# Altium PCB PCB1.PcbDoc
Units mil, origin at the board's own origin, x right, y up, seen from the top; angles counter-clockwise.
Board outline 3000 x 2500 mil, 2 copper layers (Top Layer, Bottom Layer); 72 components, 43 nets, 247 pads, 80 vias.
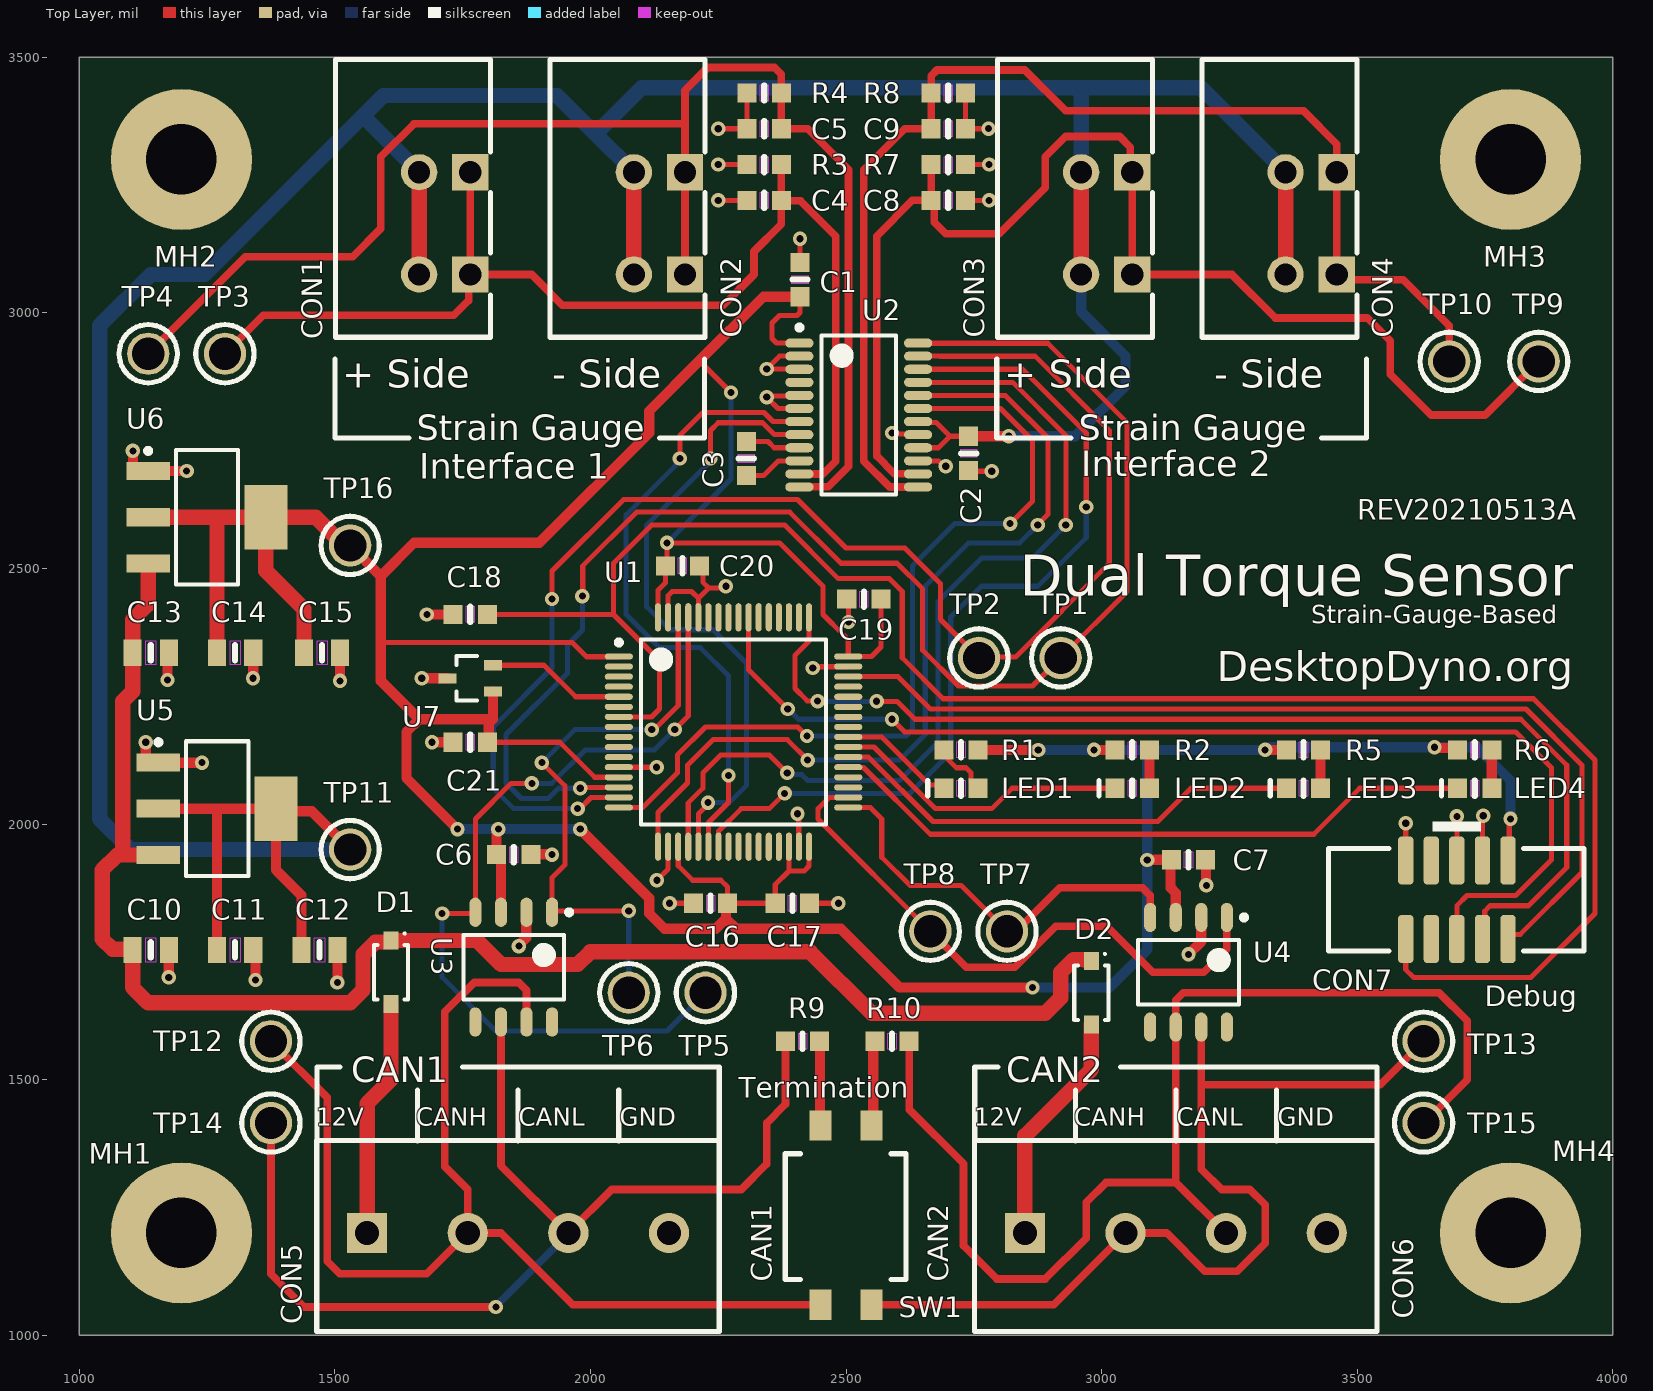
[diagram p0: Top Layer view]
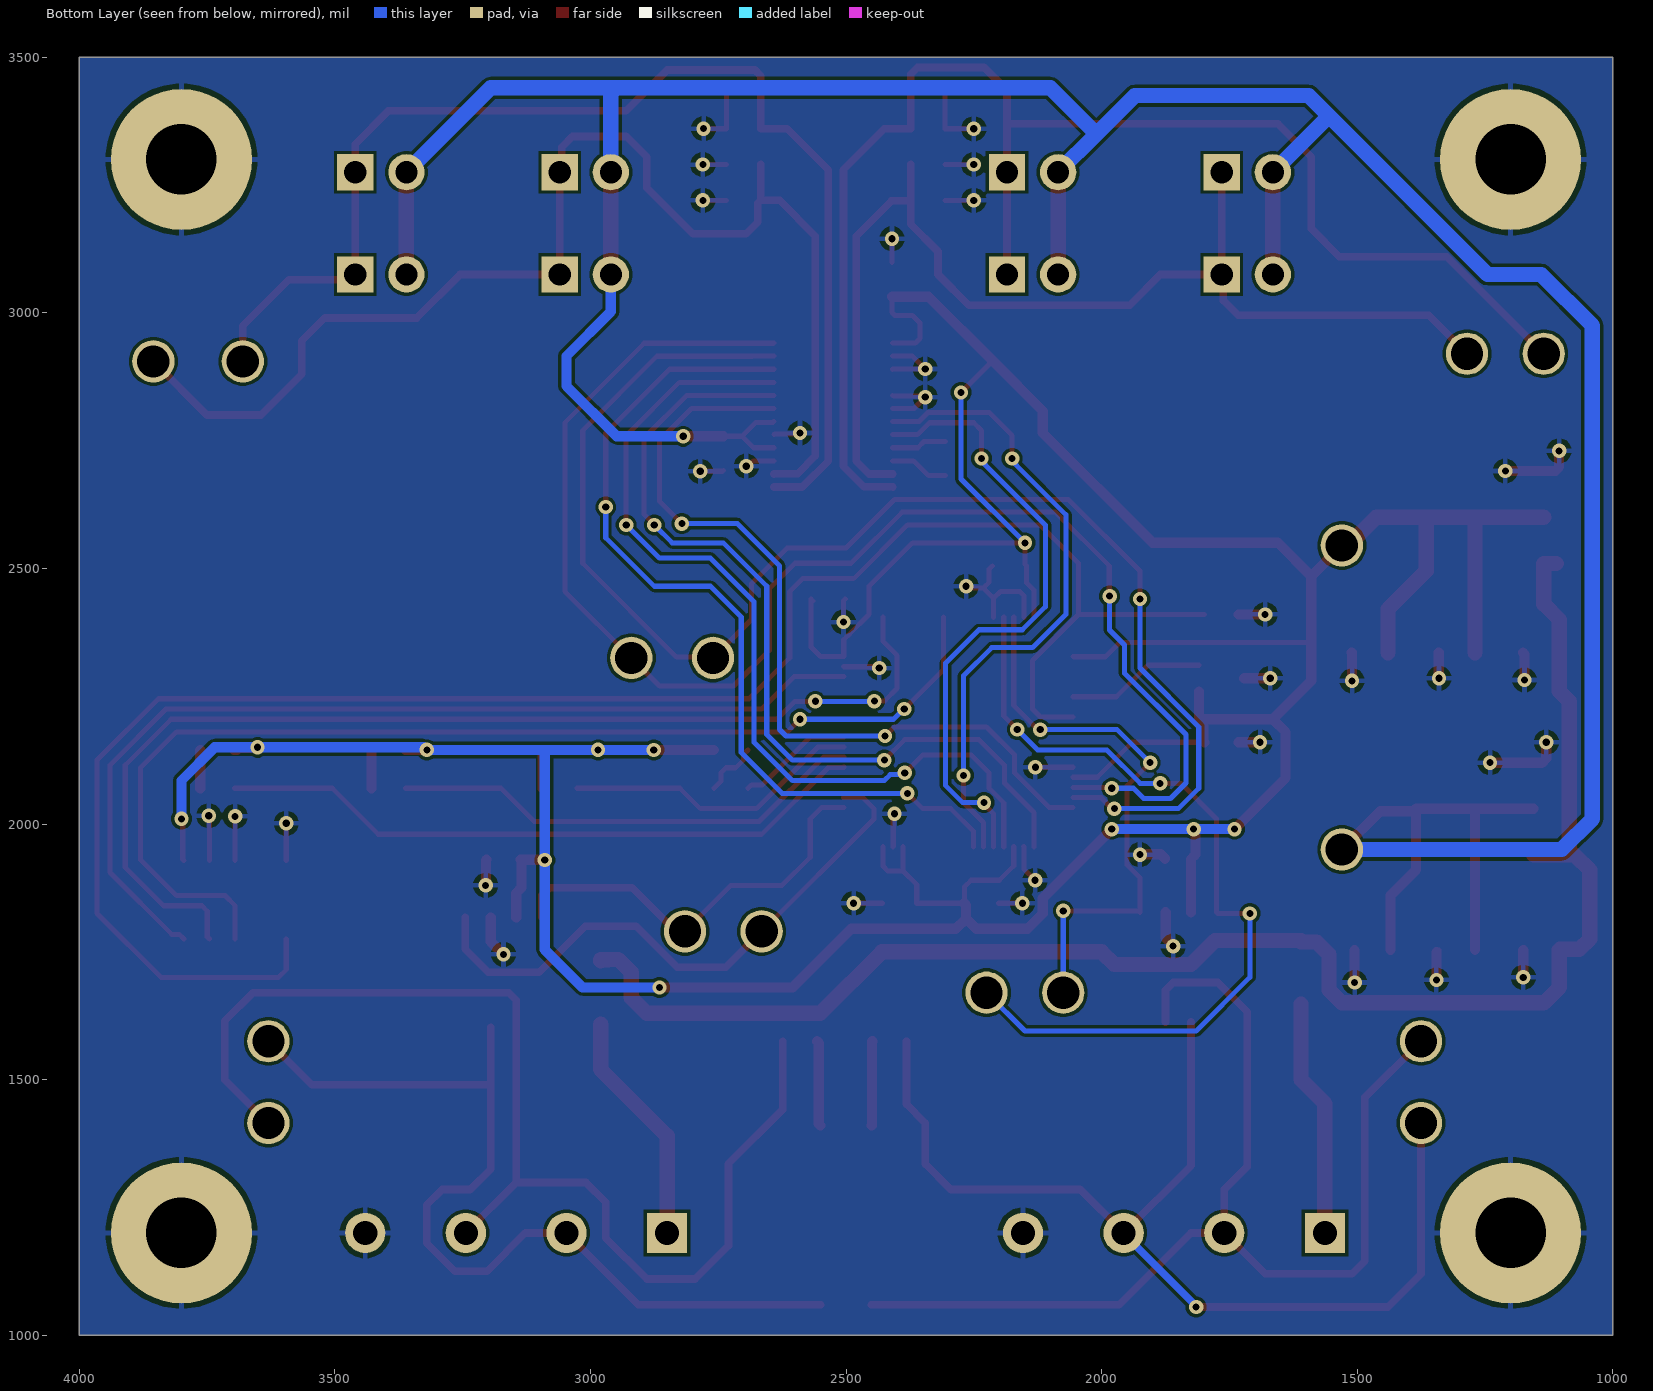
[diagram p1: Bottom Layer view, seen from below]
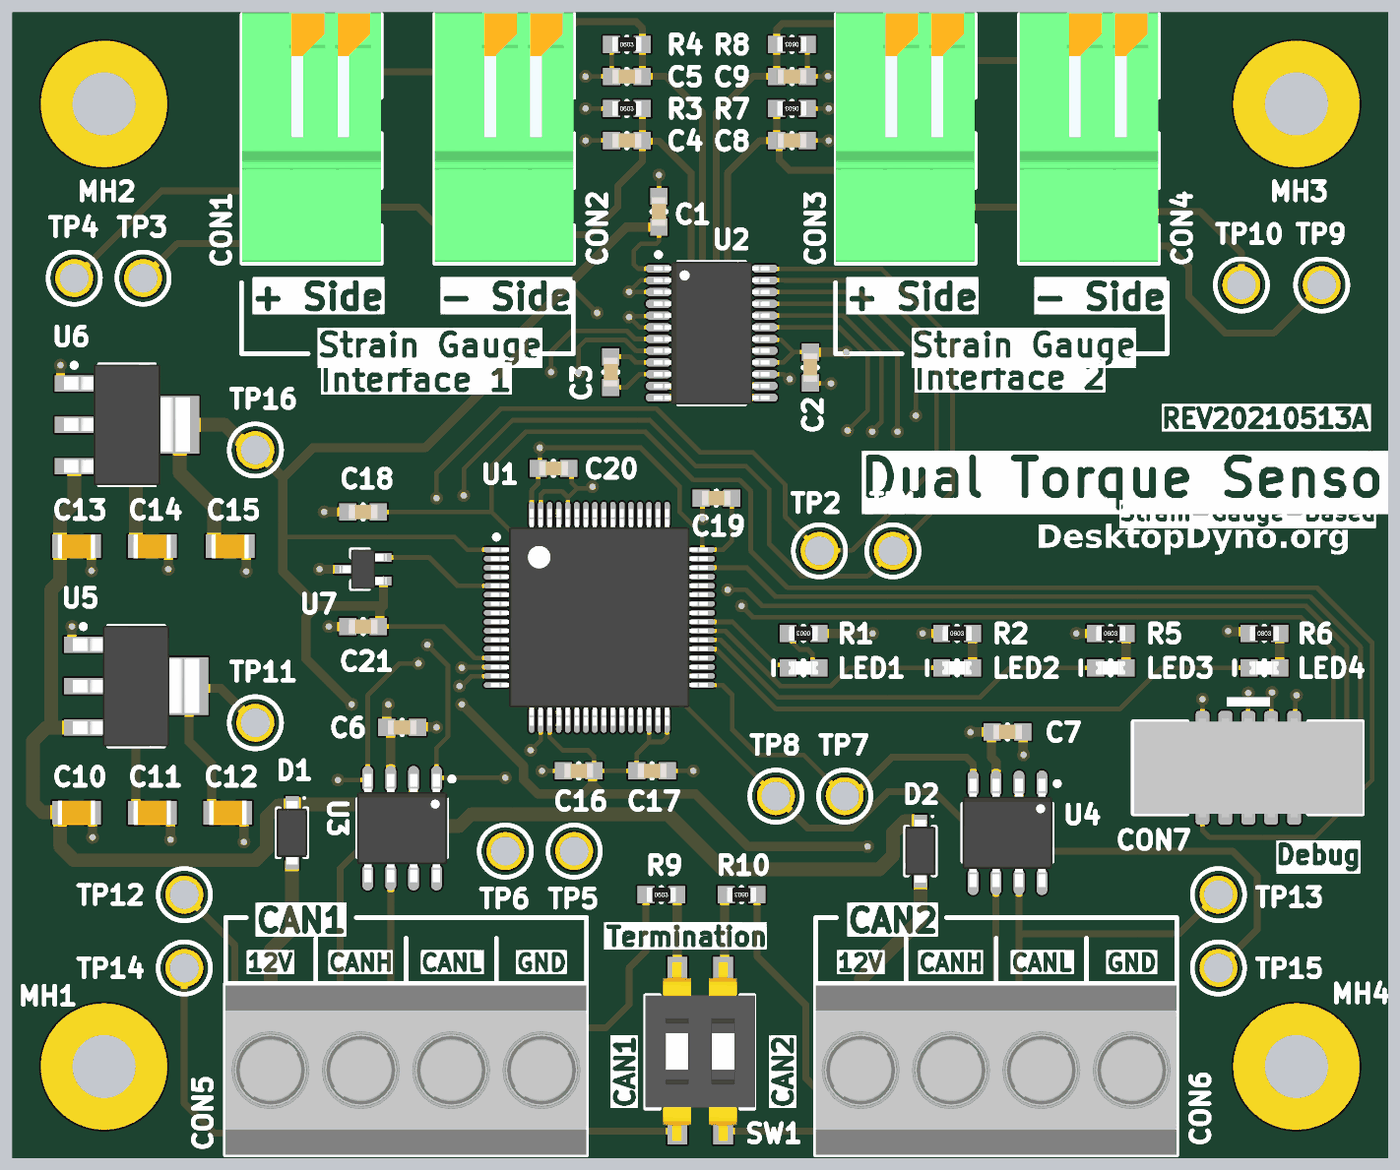
[diagram p2: 3D render of the assembled board from above, using the file's embedded part models]

## Layer stack, top to bottom
Top Solder: solder mask 0.4, Solder Resist, Dk 3.5
Top Layer: signal copper 1.4
Dielectric 1: dielectric 12.6, FR-4, Dk 4.8
Bottom Layer: signal copper 1.4
Bottom Solder: solder mask 0.4, Solder Resist, Dk 3.5

## Board outline
1000,1000 1000,3500 4000,3500 4000,1000

## Design rules (kind name [scope] priority, off if disabled: settings)
Clearance [All] p1: gap=6 ignorepadtopadclearanceinfootprint=FALSE
DiffPairsRouting [All] p1: maxlimit=10 minlimit=10 mostfreqgap=10 toplayer_minwidth=15 toplayer_maxwidth=15 toplayer_prefwidth=15 bottomlayer_minwidth=15 bottomlayer_maxwidth=15 bottomlayer_prefwidth=15 maxuncoupledlength=3000
Height [All] p1: minheight=0 maxheight=5000 prefheight=500
HoleSize [All] p1: absolutevalues=TRUE maxlimit=250 minlimit=14 maxpercent=80.000 minpercent=20.000
PolygonConnect [All] p1: connectstyle=Relief reliefconductorwidth=10 reliefentries=4 polygonreliefangle="90 Angle" airgapwidth=10
RoutingVias [All] p1: holewidth=14 width=28 viastyle="Through Hole" minholewidth=14 minwidth=28 maxholewidth=38 maxwidth=50
SolderMaskExpansion [All] p1: expansion=4 istentingtop=FALSE
Width [All] p1: maxlimit=250 minlimit=6 preferedwidth=10
27 further rules are at their usual default settings.

## Classes and differential pairs
differential pair AIN2: +AIN2_P -AIN2_N
differential pair AIN1: +AIN1_P -AIN1_N

## Components (designator, comment, footprint, x,y, rotation, side; value= is the part's Value field where it differs from the comment)
C1 "Capacitor" 0603-CAP 2410,3065 r270 top value=0.1uF
C2 "Capacitor" 0603-CAP 2740,2725 r90 top value=0.1uF
C3 "Capacitor" 0603-CAP 2305,2715 r90 top value=0.1uF
C4 "Capacitor" 0603-CAP 2340,3220 r180 top value=0.1uF
C5 "Capacitor" 0603-CAP 2340,3360 r180 top value=0.1uF
C6 "Capacitor" 0603-CAP 1850,1940 r0 top value=0.1uF
C7 "Capacitor" 0603-CAP 3170,1930 r0 top value=0.1uF
C8 "Capacitor" 0603-CAP 2700,3220 r0 top value=0.1uF
C9 "Capacitor" 0603-CAP 2700,3360 r0 top value=0.1uF
C10 "Capacitor" 0805-CAP 1140,1753.62 r0 top value=10uF
C11 "Capacitor" 0805-CAP 1305,1753.62 r0 top value=10uF
C12 "Capacitor" 0805-CAP 1470,1753.62 r0 top value=10uF
C13 "Capacitor" 0805-CAP 1140,2335 r0 top value=10uF
C14 "Capacitor" 0805-CAP 1305,2335 r0 top value=10uF
C15 "Capacitor" 0805-CAP 1475,2335 r0 top value=10uF
C16 "Capacitor" 0603-CAP 2235,1845 r180 top value=0.1uF
C17 "Capacitor" 0603-CAP 2395,1845 r0 top value=0.1uF
C18 "Capacitor" 0603-CAP 1765,2410 r180 top value=0.1uF
C19 "Capacitor" 0603-CAP 2535,2440 r180 top value=0.1uF
C20 "Capacitor" 0603-CAP 2180,2505 r0 top value=0.1uF
C21 "Capacitor" 0603-CAP 1765,2160 r180 top value=0.1uF
CON1 "TBL003-254-02GR-2OR" TBL003-254-02GR-2OR 1765,3275 r180 top
CON2 "TBL003-254-02GR-2OR" TBL003-254-02GR-2OR 2185,3275 r180 top
CON3 "TBL003-254-02GR-2OR" TBL003-254-02GR-2OR 3060,3275 r180 top
CON4 "TBL003-254-02GR-2OR" TBL003-254-02GR-2OR 3460,3275 r180 top
CON5 "0395430004" 0395430004 1563.15,1200 r0 top
CON6 "0395430004" 0395430004 2850,1200 r0 top
CON7 "20021521-00010D4LF" 20021521-00010D4LF 3695,1851.77 r180 top
D1 "PMEG4005EH,115" SODFL350X120-2N 1610,1710 r270 top
D2 "PMEG4005EH,115" SODFL350X120-2N 2980,1670 r270 top
LED1 "LED" 0603-LED 2725,2070 r0 top value=RED
LED2 "LED" 0603-LED 3060,2070 r0 top value=RED
LED3 "LED" 0603-LED 3395,2070 r0 top value=RED
LED4 "LED" 0603-LED 3730,2070 r0 top value=RED
MH1 "M3" M3_HOLE 1200,1200 r0 top
MH2 "M3" M3_HOLE 1200,3300 r0 top
MH3 "M3" M3_HOLE 3800,3300 r0 top
MH4 "M3" M3_HOLE 3800,1200 r0 top
R1 "Resistor" 0603-RES 2725,2145 r180 top value=1k
R2 "Resistor" 0603-RES 3060,2145 r0 top value=1k
R3 "Resistor" 0603-RES 2340,3290 r0 top value=348
R4 "Resistor" 0603-RES 2340,3430 r0 top value=348
R5 "Resistor" 0603-RES 3395,2145 r0 top value=1k
R6 "Resistor" 0603-RES 3730,2145 r0 top value=1k
R7 "Resistor" 0603-RES 2700,3290 r180 top value=348
R8 "Resistor" 0603-RES 2700,3430 r180 top value=348
R9 "Resistor" 0603-RES 2415,1575 r0 top value=120
R10 "Resistor" 0603-RES 2590,1575 r180 top value=120
SW1 "DS04-254-2-02BK-SMT" DS04-254-2-02BK-SMT 2450,1059.61 r0 top
TP1 "Test Point" TP_1.6MM 2920,2325 r0 top
TP2 "Test Point" TP_1.6MM 2760,2325 r0 top
TP3 "Test Point" TP_1.6MM 1285,2920 r0 top
TP4 "Test Point" TP_1.6MM 1135,2920 r0 top
TP5 "Test Point" TP_1.6MM 2225,1670 r0 top
TP6 "Test Point" TP_1.6MM 2075,1670 r0 top
TP7 "Test Point" TP_1.6MM 2815,1790 r0 top
TP8 "Test Point" TP_1.6MM 2665,1790 r0 top
TP9 "Test Point" TP_1.6MM 3855,2905 r0 top
TP10 "Test Point" TP_1.6MM 3680,2905 r0 top
TP11 "Test Point" TP_1.6MM 1530,1950 r0 top
TP12 "Test Point" TP_1.6MM 1375,1575 r0 top
TP13 "Test Point" TP_1.6MM 3630,1575 r0 top
TP14 "Test Point" TP_1.6MM 1375,1415 r0 top
TP15 "Test Point" TP_1.6MM 3630,1415 r0 top
TP16 "Test Point" TP_1.6MM 1530,2545 r0 top
U1 "STM32F412RET6" TSQFP50P1200X1200X160-64N 2280,2180 r0 top
U2 "ADS1232IPWR" TSOP65P640X120-24N 2525,2800 r0 top
U3 "SN65HVD232QDR" SOIC127P600X175-8N 1850,1720 r270 top
U4 "SN65HVD232QDR" SOIC127P600X175-8N 3170,1710 r270 top
U5 "AZ1117IH-5.0TRG1" SOT230P700X180-4N 1270,2030 r0 top
U6 "AZ1117IH-3.3TRG1" SOT230P700X180-4N 1250,2600 r0 top
U7 "MAX7375AXR805+T" SOT65P210X110-3N 1765,2285 r180 top

## Footprints (in the part's own frame and the unit in brackets; to place one, negate y for a bottom-side part, rotate by r counter-clockwise, add the part's x,y. Pads: shape width x height; smd on the part's side, far side on the other; paste and mask are expansions set on the pad)
0603-CAP [mm]
  rect 0.95x0.95 smd: 1(-0.85,0) 2(0.85,0)
  Top Layer keep-out region: -0.2,0.4 0.2,0.4 0.2,-0.4 -0.2,-0.4
  silkscreen extent 0,-0.38 0,0.38, body extent -0.8,-0.4 0.8,0.4, height 0.79
0603-LED [mm]
  rect 0.95x0.95 smd: A(0.85,0) C(-0.85,0)
  Top Layer keep-out region: -0.2,0.4 0.2,0.4 0.2,-0.4 -0.2,-0.4
  silkscreen extent -1.65,-0.38 0,0.38, body extent -0.83,-0.37 0.82,0.36, height 0.68
0603-RES [mm]
  rect 0.95x0.95 smd: 1(-0.85,0) 2(0.85,0)
  Top Layer keep-out region: -0.2,0.4 0.2,0.4 0.2,-0.4 -0.2,-0.4
  silkscreen extent 0,-0.38 0,0.38, body extent -0.8,-0.4 0.8,0.4, height 0.44
0805-CAP [mm] "Chip Capacitor, 2-Leads, Body 2.00x1.25mm, IPC Medium Density"
  rect 0.9x1.3 smd: 1(-0.9,0) 2(0.9,0)
  Top Layer keep-out region: -0.25,0.6 0.25,0.6 0.25,-0.6 -0.25,-0.6
  silkscreen extent 0,-0.38 0,0.38, body extent -1.05,-0.67 1.05,0.68, height 0.9
20021521-00010D4LF [mm] "CONN HEADER SMD 10POS 1.27MM"
  rrect50% 0.76x2.4 smd: 1(-2.54,-1.95) 2(-2.54,1.95) 3(-1.27,-1.95) 4(-1.27,1.95) 5(0,-1.95) 6(0,1.95) 7(1.27,-1.95) 8(1.27,1.95) 9(2.54,-1.95) 10(2.54,1.95)
  silkscreen extent -6.32,-3.9 6.38,2.55, body extent -6.32,-2.75 6.33,2.75, height 5.65
0395430004 [mm] "TERM BLK 4POS SIDE ENTRY 5MM PCB"
  rect 2x2 hole 1.2: 1(0,0)
  round 2 hole 1.2: 2(5,0) 3(10,0) 4(15,0)
  silkscreen extent -2.5,-4.9 17.5,4.6, body extent -2.49,-4.9 17.49,4.5, height 14.63
DS04-254-2-02BK-SMT [mm] "DIP SWITCH, SPST, 2.54 PITCH, FL"
  rect 1.1x1.5 smd: 1(0,0) 2(0,8.9) 3(2.54,0) 4(2.54,8.9)
  silkscreen extent -1.75,1.25 4.25,7.5, body extent -1.78,-0.55 4.3,9.35, height 4.01
M3_HOLE [mm]
  round 7 hole 3.5: 1(0,0)
SODFL350X120-2N [mm] "SODFL, 2-Leads, Body 1.60x3.50mm, IPC Medium Density"
  rect 0.9x0.75 smd: 1(-1.575,0) 2(1.575,0)
  silkscreen extent -1.97,-0.85 1.35,0.85, body extent -1.75,-0.85 1.75,0.85, height 1.2
SOIC127P600X175-8N [mm] "SOIC, 8-Leads, Body 4.90x3.90mm, Pitch 1.27mm, IPC Medium Density"
  oval 1.45x0.6 smd: 1(-2.725,1.905) 2(-2.725,0.635) 3(-2.725,-0.635) 4(-2.725,-1.905) 5(2.725,-1.905) 6(2.725,-0.635) 7(2.725,0.635) 8(2.725,1.905)
  silkscreen extent -2.85,-2.5 1.6,2.88, body extent -3,-2.5 3,2.5, height 1.75
SOT65P210X110-3N [mm] "SOT23, 3-Leads, Body 2.00x2.10mm, Pitch 0.65mm, IPC Medium Density"
  rect 0.9x0.5 smd: 1(-1.125,0.65) 2(-1.125,-0.65) 3(1.125,0)
  silkscreen extent -0.32,-1.1 0.67,1.1, body extent -1.3,-1.1 1.3,1.1, height 1.1
SOT230P700X180-4N [mm] "SOT223, 4-Leads, Body 6.50x7.00mm (avg), Pitch 2.30mm, IPC Medium Density"
  rect 2.15x0.9 smd: 1(-2.925,2.3) 2(-2.925,0) 3(-2.925,-2.3)
  rect 2.15x3.2 smd: 4(2.925,0)
  silkscreen extent -3.05,-3.35 1.55,3.42, body extent -3.5,-3.35 3.5,3.35, height 1.8
TBL003-254-02GR-2OR [mm] "TERMINAL BLOCK, SCREWLESS, 2.54,"
  rect 1.8x1.8 hole 1.1: 1(0,5.08) 1(0,0)
  round 1.8 hole 1.1: 2(2.54,5.08) 2(2.54,0)
  silkscreen extent -1,-5.6 6.7,8.2, body extent -0.98,-5.7 6.7,8.1, height 12.75
TP_1.6MM [mm]
  round 2.1 hole 1.6: 1(0,0)
  silkscreen extent -1.45,-1.45 1.45,1.45, body extent -1.52,-1.51 1.52,1.53, height 5
TSOP65P640X120-24N [mm] "TSOP, 24-Leads, Body 7.80x4.40mm, Pitch 0.65mm, IPC Medium Density"
  oval 1.4x0.45 smd: 1(-2.95,3.575) 2(-2.95,2.925) 3(-2.95,2.275) 4(-2.95,1.625) 5(-2.95,0.975) 6(-2.95,0.325) 7(-2.95,-0.325) 8(-2.95,-0.975) 9(-2.95,-1.625) 10(-2.95,-2.275) 11(-2.95,-2.925) 12(-2.95,-3.575) 13(2.95,-3.575) 14(2.95,-2.925) 15(2.95,-2.275) 16(2.95,-1.625) 17(2.95,-0.975) 18(2.95,-0.325) 19(2.95,0.325) 20(2.95,0.975) 21(2.95,1.625) 22(2.95,2.275) 23(2.95,2.925) 24(2.95,3.575)
  silkscreen extent -3.07,-3.95 1.85,4.47, body extent -3.2,-3.95 3.2,3.95, height 1.2
TSQFP50P1200X1200X160-64N [mm] "TSQFP, 64-Leads, Body 10.00x10.00mm, Pitch 0.50mm, IPC Medium Density"
  oval 1.4x0.3 smd: 1(-5.7,3.75) 2(-5.7,3.25) 3(-5.7,2.75) 4(-5.7,2.25) 5(-5.7,1.75) 6(-5.7,1.25) 7(-5.7,0.75) 8(-5.7,0.25) 9(-5.7,-0.25) 10(-5.7,-0.75) 11(-5.7,-1.25) 12(-5.7,-1.75) 13(-5.7,-2.25) 14(-5.7,-2.75) 15(-5.7,-3.25) 16(-5.7,-3.75) 33(5.7,-3.75) 34(5.7,-3.25) 35(5.7,-2.75) 36(5.7,-2.25) 37(5.7,-1.75) 38(5.7,-1.25) 39(5.7,-0.75) 40(5.7,-0.25) 41(5.7,0.25) 42(5.7,0.75) 43(5.7,1.25) 44(5.7,1.75) 45(5.7,2.25) 46(5.7,2.75) 47(5.7,3.25) 48(5.7,3.75)
  oval 0.3x1.4 smd: 17(-3.75,-5.7) 18(-3.25,-5.7) 19(-2.75,-5.7) 20(-2.25,-5.7) 21(-1.75,-5.7) 22(-1.25,-5.7) 23(-0.75,-5.7) 24(-0.25,-5.7) 25(0.25,-5.7) 26(0.75,-5.7) 27(1.25,-5.7) 28(1.75,-5.7) 29(2.25,-5.7) 30(2.75,-5.7) 31(3.25,-5.7) 32(3.75,-5.7) 49(3.75,5.7) 50(3.25,5.7) 51(2.75,5.7) 52(2.25,5.7) 53(1.75,5.7) 54(1.25,5.7) 55(0.75,5.7) 56(0.25,5.7) 57(-0.25,5.7) 58(-0.75,5.7) 59(-1.25,5.7) 60(-1.75,5.7) 61(-2.25,5.7) 62(-2.75,5.7) 63(-3.25,5.7) 64(-3.75,5.7)
  silkscreen extent -5.82,-4.6 4.6,4.6, body extent -6,-6 6,6, height 1.6

## Part data
C1 C2 C3 C4 C5 C6 C7 C8 C9 C16 C17 C18 C19 C20 C21: Supplier Part Number 1=732-7965-1-ND, Supplier 1=Digi-Key
C10 C11 C12 C13 C14 C15: Supplier Part Number 1=1276-2891-1-ND, Supplier 1=Digi-Key
CON1 CON2 CON3 CON4: "TERMINAL BLOCK, SCREWLESS, 2.54,", Supplier Part Number 1=102-6385-ND, Supplier 1=Digi-Key
CON5 CON6: "TERM BLK 4POS SIDE ENTRY 5MM PCB", Supplier Part Number 1=WM13967-ND, Supplier 1=Digi-Key
CON7: "CONN HEADER SMD 10POS 1.27MM", Supplier Part Number 1=609-6533-ND, Supplier 1=Digi-Key
D1 D2: "DIODE SCHOTTKY 40V 500MA SOD123F", Supplier Part Number 1=1727-3876-1-ND, Supplier 1=Digi-Key
LED1 LED2 LED3 LED4: Supplier Part Number 1=732-4978-1-ND, Supplier 1=Digi-Key
MH1 MH2 MH3 MH4: library part M3_HOLE, "M3 MOUNTING HOLE"
R1 R2 R5 R6: Supplier Part Number 1=311-1KLDCT-ND, Supplier 1=Digi-Key
R3 R4 R7 R8: Supplier Part Number 1=YAG4536CT-ND, Supplier 1=Digi-Key
R9 R10: Supplier Part Number 1=311-120HRCT-ND, Supplier 1=Digi-Key
SW1: "DIP SWITCH, SPST, 2.54 PITCH, FL", Supplier Part Number 1=2223-DS04-254-2-02BK-SMT-ND, Supplier 1=Digi-Key
TP1 TP2 TP3 TP4 TP5 TP6 TP7 TP8 TP9 TP10 TP11 TP12 TP13 TP14 TP15 TP16: Supplier Part Number 1=36-5120-ND, Supplier 1=Digi-Key
U1: "IC MCU 32BIT 512KB FLASH 64LQFP", Supplier Part Number 1=497-18546-ND, Supplier 1=Digi-Key
U2: "IC ADC 24BIT SIGMA-DELTA 24TSSOP", Supplier Part Number 1=296-25894-1-ND, Supplier 1=Digi-Key
U3 U4: "IC TRANSCEIVER HALF 1/1 8SOIC", Supplier Part Number 1=296-52699-1-ND, Supplier 1=Digi-Key
U5: "IC REG LINEAR 5V 1A SOT223", Supplier Part Number 1=AZ1117IH-5.0TRG1DICT-ND, Supplier 1=Digi-Key
U6: "IC REG LINEAR 3.3V 1A SOT223", Supplier Part Number 1=AZ1117IH-3.3TRG1DICT-ND, Supplier 1=Digi-Key
U7: "MEMS OSC XO 8.0000MHZ CMOS SMD", Supplier Part Number 1=MAX7375AXR805+TCT-ND, Supplier 1=Digi-Key

## Via types
v1: diameter 28, hole 14, Top Layer to Bottom Layer, tented both sides, 80 vias

## Nets (pads, with @x,y where several pads share a name; then routed paths per layer and width w, separated by ;. In a path a pad name is that pad's centre, name@x,y a point inside that pad or via, vN(x,y) a via of type N, cw(c..) or ccw(c..) an arc to the next point about the centre after c; other vN are vias at no path point)
3V3: C1.2 C6.1 C7.1 C14.1 C15.1 C16.1 C17.1 C19.1 C20.1 C21.1 CON7.1 R1.1 R2.1 R5.1 R6.1 TP16.1 U1.1 U1.13 U1.19 U1.30 U1.32 U1.48 U1.64 U2.1 U3.3 U4.3 U6.2 U6.4 U7.1 | length 9300.8
  Top Layer w10: 1590,2360 1595,2355 1964.58,2355 1992.29,2327.29 2055.24,2327.29 U1.1 ; C21.1 1940,2160 2008.58,2091.42 U1.13 ; U1.64 2132.36,2457.36 2146.54,2471.54 C20.1 2150,2508.46 v1(2150,2550) 2370,2550 2455,2465 2455,2409.64 2494.64,2370 2495,2370 2504.41,2360.59 U1.48 2550,2327.64 2568.46,2346.1 C19.1 C19.1@2565,2436.54 ; U1.19 2171.73,1918.27 2200,1890 2255,1890 2268.46,1876.54 C16.1 C17.1 2361.54,1881.54 2388.27,1908.27 ; 2211.08,2903.92 2215.37,2903.92 v1(2275.01,2844.28) ; U1.30 2388.27,1908.27 ; U2.1 2364.25,2940.75 2355,2950 2355,2980 2370,2995 2404.14,2995 2410,3000.86 C1.2 ; U1.32 2427.64,1917.64 2418.27,1908.27 2388.27,1908.27 ; CON7.1 3797.5,1931.04 3797.5,2007.5 v1(3800,2010)
  Top Layer w20: TP16.1 1590,2485 ; v1(1740,1990) 1640,2090 1640,2180 1665,2205 ; C21.1 1801.28,2162.81 1801.28,2196.99 1809.29,2205 ; U7.1 1809.29,2205 ; v1(1820,1990) 1820,1987.84 1816.46,1984.3 1816.46,1940.07 1825,1931.54 U3.3 ; v1(1980,1990) 2115,1855 2115,1825 2145,1795 2245,1795 2265,1815 ; C16.1 2265,1841.54 2265,1815 ; C1.2 2338.7,3031.54 2211.08,2903.92 2115,2807.84 2115,2765 1900,2550 1655,2550 1590,2485 ; R1.1 2875.84,2145 v1(2876.01,2144.83) ; v1(2865,1680) 2605,1680 2490,1795 2285,1795 2265,1815 ; v1(2985,2145) R2.1 ; v1(3089.25,1929.44) 3089.81,1930 C7.1 3135,1928.46 3135,1875 3145,1865 U4.3 ; v1(3320,2145) R5.1 ; v1(3651.08,2150) 3652.61,2148.47 3687.83,2148.47 3691.3,2145 R6.1 ; 1590,2485 1590,2360 1590,2280 1665,2205 ; 1665,2205 1809.29,2205
  Top Layer w30: U6.2 1270,2600 ; C14.1 1269.57,2599.57 1270,2600 ; C15.1 1439.57,2420.43 1365.16,2494.84 U6.4 ; TP16.1 1517.9,2545 1462.9,2600 U6.4 ; 1270,2600 U6.4
  Bottom Layer w10: v1(2150,2550) 2275,2675 v1(2275.01,2844.28)
  Bottom Layer w20: v1(1740,1990) v1(1820,1990) v1(1980,1990) ; v1(2865,1680) 3015,1680 3089.25,1754.25 v1(3089.25,1929.44) 3089.25,2144.25 3090,2145 ; v1(2876.01,2144.83) 2876.09,2144.92 2984.92,2144.92 v1(2985,2145) 3090,2145 ; v1(3800,2010) 3800,2085 3735,2150 v1(3651.08,2150) 3327.16,2150 3322.16,2145 v1(3320,2145) 3090,2145
5VA: C2.2 C11.1 C12.1 CON1.2 CON2.2 CON3.2 CON4.2 TP11.1 U2.16 U2.18 U5.2 U5.4 | length 7119.4
  Top Layer w10: U2.16 2681.02,2736.02 2703.46,2758.46 ; U2.18 2642.62,2785.73 2676.2,2785.73 2703.46,2758.46 ; C2.2 2703.46,2758.46
  Top Layer w20: U5.2 1270,2030 ; C11.1 1269.57,2029.57 1270,2030 ; C12.1 1434.57,1860.43 1385.16,1909.84 U5.4 ; TP11.1 1454.91,2025.09 1390.06,2025.09 U5.4 ; C2.2 v1(2818.46,2758.46) ; 1270,2030 U5.4
  Top Layer w30: CON1.2@1665,3075 CON1.2@1665,3275 ; CON2.2@2085,3075 CON2.2@2085,3275 ; CON3.2@2960,3075 CON3.2@2960,3275 ; CON4.2@3360,3075 CON4.2@3360,3275
  Bottom Layer w20: v1(2818.46,2758.46) 2948.46,2758.46 3046.72,2856.72 3046.72,2915.62 2960,3002.33 CON3.2@2960,3075
  Bottom Layer w30: TP11.1 1100,1950 1040,2010 1040,2975 1140,3075 1245,3075 1555,3385 ; CON1.2@1665,3275 1555,3385 ; CON2.2@2085,3275 2010,3350 ; CON3.2@2960,3275 2960,3430 2950,3440 ; CON4.2@3360,3275 3195,3440 2950,3440 ; 1555,3385 1595,3425 1935,3425 2010,3350 ; 2010,3350 2100,3440 2950,3440
12VA: CON5.1 D1.2 | length 467.4
  Top Layer w30: CON5.1 1563.15,1453.15 1610,1500 D1.2
12VB: CON6.1 D2.2 | length 461.8
  Top Layer w30: CON6.1 2850,1390 2980,1520 D2.2
AIN1_N: C5.1 CON2.1 R4.2 TP4.1 U2.12 | length 2855.5
  Top Layer w15: TP4.1 1325,3110 1535,3110 1590,3165 1590,3305 1655,3370 2185,3370 ; CON2.1@2185,3075 2185,3275 2185,3370 ; U2.12 2409.15,2659.55 2464.9,2659.55 2505,2699.64 2505,3280 2425,3360 C5.1 R4.2 2373.46,3466.54 2360,3480 2230,3480 2185,3435 2185,3370
AIN1_P: C4.1 CON1.1 R3.2 TP3.1 U2.11 | length 2271.2
  Top Layer w15: TP3.1 1360,2995 1732.53,2995 1761.77,3024.23 1761.77,3071.77 CON1.1@1765,3075 ; CON1.1@1765,3275 CON1.1@1765,3075 ; R3.2 C4.1 ; U2.11 2409.15,2684.55 2454.55,2684.55 2480,2710 2480,3150 2410.88,3219.12 2374.34,3219.12 C4.1 ; CON1.1@1765,3075 1885,3075 1945,3015 2260,3015 2320,3075 2320,3120 2373.46,3173.46 C4.1
AIN2_N: C9.1 CON4.1 R8.2 TP10.1 U2.13 | length 2410.2
  Top Layer w15: U2.13 2585.39,2659.25 2535,2709.64 2535,3280 2615,3360 C9.1 R8.2 2666.54,3463.46 2678.07,3475 2850,3475 2930,3395 3395,3395 3460,3330 3460,3275 3460,3075 3470,3065 3590,3065 3680,2975 TP10.1
AIN2_P: C8.1 CON3.1 R7.2 TP9.1 U2.14 | length 2532.7
  Top Layer w15: U2.14 2640.62,2685.36 2594.64,2685.36 2560,2720 2560,3150 2630,3220 C8.1 ; R7.2 C8.1 ; TP9.1 3750,2800 3645,2800 3565,2880 3565,2945 3520,2990 3340,2990 3255,3075 3060,3075 3060,3275 3055.85,3279.15 3055.85,3324.15 3035,3345 2930,3345 2890,3305 2890,3245 2800,3155 2695,3155 2672.41,3177.59 2672.41,3214.12 C8.1
CAN1_H: CON5.2 SW1.1 TP12.1 U3.7 | length 2245.6
  Top Layer w15: TP12.1 1485,1465 1485,1145 1510,1120 1680,1120 CON5.2 ; U3.7 1875,1675 1860,1690 1772.57,1690 1715,1632.43 1715,1330 1760,1285 CON5.2 ; SW1.1 1965.39,1059.61 1825,1200 CON5.2
CAN1_L: CON5.3 R9.1 TP14.1 U3.6 | length 2132.2
  Top Layer w15: TP14.1 1375,1120 1440,1055 v1(1815,1055) ; U3.6 1825,1331.85 CON5.3 2041.85,1285 2295,1285 2345,1335 2345,1415 2381.54,1451.54 R9.1
  Bottom Layer w15: v1(1815,1055) 1815,1056.57 1956.85,1198.43 CON5.3
CAN1_RX: TP5.1 U1.61 U3.4 | length 1656.1
  Top Layer w10: v1(1710,1825) 1772.72,1825 U3.4 1775,2010 1844.5,2079.5 v1(1885.5,2079.5) ; v1(2165,2185) 2191.42,2211.42 U1.61
  Bottom Layer w10: v1(1710,1825) 1710,1700 1815,1595 2150,1595 TP5.1 ; v1(1885.5,2079.5) 1924.44,2079.5 1989.94,2145 2125,2145 v1(2165,2185)
CAN1_TX: TP6.1 U1.62 U3.1 | length 1118.5
  Top Layer w10: v1(1905,2120) 1950,2075 1950,1920 1925,1895 U3.1 1927.72,1830 v1(2075,1830) ; v1(2120.01,2184.53) 2124.53,2184.53 2171.73,2231.73 U1.62
  Bottom Layer w10: v1(1905,2120) 1969.53,2184.53 v1(2120.01,2184.53) ; TP6.1 v1(2075,1830)
CAN2_H: CON6.2 SW1.3 TP13.1 U4.7 | length 1858.9
  Top Layer w15: SW1.3 2906.46,1059.61 CON6.2 3127.05,1200 3202.05,1125 3265,1125 3320,1180 3320,1255 3290,1285 3235,1285 3195,1325 3195,1490 ; U4.7 3195,1490 ; TP13.1 3545,1490 3195,1490
CAN2_L: CON6.3 R10.1 TP15.1 U4.6 | length 2335.3
  Top Layer w15: R10.1 2623.46,1441.54 2730,1335 2730,1175 2795,1110 2890,1110 2970,1190 2970,1260 3008.7,1298.7 3145,1298.7 ; CON6.3 3145,1298.7 ; TP15.1 3715,1500 3715,1615 3660,1670 3160,1670 3145,1655 U4.6 3145,1298.7
CAN2_RX: TP7.1 U1.33 U4.4 | length 819.1
  Top Layer w10: U1.33 2547.64,2032.36 2570,2010 2570,1935 2625,1880 2725,1880 TP7.1
  Top Layer w15: TP7.1 2833.31,1790 2918.31,1875 3080,1875 3095,1860 U4.4
CAN2_TX: TP8.1 U1.34 U4.1 | length 1160
  Top Layer w10: U1.34 2467.05,2052.05 2445,2030 2445,2010 TP8.1
  Top Layer w15: TP8.1 2735,1720 2830,1720 2910,1800 3010,1800 3100,1710 3200,1710 3245,1755 U4.1
GND: C1.1 C2.1 C4.2 C5.2 C6.2 C7.2 C8.2 C9.2 C10.2 C11.2 C12.2 C13.2 C14.2 C15.2 C16.2 C17.2 C18.2 C19.2 C20.2 C21.2 CON5.4 CON6.4 CON7.3 CON7.5 CON7.9 MH1.1 MH2.1 MH3.1 MH4.1 R3.1 R4.1 R7.1 R8.1 U1.12 U1.18 U1.31 U1.47 U1.60 U1.63 U2.2 U2.3 U2.5 U2.6 U2.15 U2.17 U3.2 U4.2 U5.1 U6.1 U7.3 | length 2898.2
  Top Layer w10: C11.2 C11.2@1345,1749.06 ; U1.12 2129.43,2111.1 v1(2129.51,2111.02) ; v1(2130,1890) 2152.05,1912.05 U1.18 U1.18@2152.39,1955.94 ; U1.63 2152.05,2447.05 2160,2455 2197.9,2455 2211.45,2441.45 ; v1(2155,1845) C16.2 ; U1.60 2211.45,2404.76 2211.45,2441.45 ; C20.2 2220,2498.46 2220,2473.11 2231.56,2461.56 ; v1(2250,3220) C4.2 ; v1(2250,3290) R3.1 ; v1(2250,3360) C5.2 R4.1 ; v1(2265,2465) 2261.56,2461.56 2231.56,2461.56 ; v1(2405,2020) 2407.61,2017.39 2407.61,1955.94 U1.31 ; U2.6 2367.2,2812.8 v1(2345,2835) 2346.91,2836.91 2407.38,2836.91 U2.5 ; U2.3 2408.64,2889.78 2345.22,2889.78 v1(2345,2890) 2370.16,2915.16 U2.2 ; C1.1 v1(2410,3145) ; C17.2 v1(2485,1845) ; v1(2435,2305) 2437.61,2307.61 2504.06,2307.61 U1.47 ; C19.2 2505,2436.54 v1(2505,2395) ; v1(2590,2765) 2591.91,2763.09 2639.67,2763.09 U2.17 ; U2.15 2680.83,2710.43 2691.26,2700 v1(2695,2700) ; C8.2 v1(2780,3220) ; R7.1 v1(2780,3290) ; R8.1 C9.2 2778.3,3360 v1(2778.64,3360.34) ; C2.1 2741.54,2690 v1(2785,2690) ; CON7.9 v1(3595.01,2001.39) ; CON7.5 v1(3695,2015) ; CON7.3 3745,2014.42 v1(3746.68,2016.1) ; 2211.45,2441.45 2231.56,2461.56
  Top Layer w20: v1(1105,2730) 1105,2698.27 1112.72,2690.55 1209.99,2690.55 v1(1210.06,2690.48) ; v1(1130,2160) 1130,2128.27 1138.27,2120 v1(1240,2120) ; v1(1172.6,2281.6) 1172.6,2332.17 C13.2 ; v1(1175,1700) 1175,1753.19 C10.2 ; v1(1340,2285) 1340.43,2285.43 C14.2 ; v1(1345,1695) C11.2@1345,1749.06 ; v1(1505,1690) 1505,1753.19 C12.2 ; v1(1510,2280) 1510.22,2280.22 1510.22,2334.78 C15.2 ; v1(1670,2285) U7.3 ; v1(1680,2410) C18.2 ; v1(1690,2160) C21.2 ; v1(1860,1761.08) 1860,1763.25 1874.31,1777.55 1874.31,1826.59 U3.2 ; C6.2@1875.69,1932.23 C6.2 1884.23,1940.77 1924.23,1940.77 v1(1925,1940) ; v1(3170,1745) 3195,1770 U4.2 ; C7.2 3204.23,1929.23 3204.23,1880.77 v1(3205,1880)
LED1: LED1.C U1.40 | length 228.6
  Top Layer w10: U1.40 2569.84,2170.16 2663.69,2076.31 2685.23,2076.31 LED1.C
LED2: LED2.C U1.39 | length 588.6
  Top Layer w10: U1.39 2554.53,2150.47 2675,2030 2785,2030 2825,2070 LED2.C
LED3: LED3.C U1.38 | length 936.2
  Top Layer w10: U1.38 2544.21,2130.79 2670,2005 3110,2005 3175,2070 LED3.C
LED4: LED4.C U1.37 | length 1283.7
  Top Layer w10: U1.37 2504.76,2110.76 2534.24,2110.76 2665,1980 3415,1980 3505,2070 LED4.C
NetC3_1: C3.1 U2.10 | length 115.8
  Top Layer w10: C3.1 2338.94,2681.54 2367.83,2710.43 U2.10
NetC3_2: C3.2 U2.9 | length 109
  Top Layer w10: C3.2 2347.16,2748.46 2359.61,2736.02 U2.9
NetLED1_A: LED1.A R1.2 | length 113.9
  Top Layer w10: R1.2 2700,2136.54 2700,2125.86 2715.86,2110 2735,2110 2744.76,2100.24 2744.76,2083.7 LED1.A
NetLED2_A: LED2.A R2.2 | length 75
  Top Layer w20: LED2.A R2.2
NetLED3_A: LED3.A R5.2 | length 75
  Top Layer w20: LED3.A R5.2
NetLED4_A: LED4.A R6.2 | length 75
  Top Layer w20: LED4.A R6.2
NetR9_2: R9.2 SW1.2 | length 165.6
  Top Layer w20: R9.2 2449.23,1574.23 2449.23,1410.77 SW1.2
NetR10_2: R10.2 SW1.4 | length 167.7
  Top Layer w20: SW1.4 2553.27,1413.27 2553.27,1571.73 R10.2
NetTP1_1: TP1.1 U1.14 U2.24 | length 2928.8
  Top Layer w10: v1(1980,2070) 1981.39,2071.39 2055.24,2071.39 U1.14 ; v1(1984.32,2445.77) 1985,2446.45 1985,2505 2090,2610 2390,2610 2490,2510 2600,2510 2650,2460 2650,2340 2720,2270 2865,2270 TP1.1 3050,2455 3050,2785 2894.63,2940.37 2641.52,2940.37 U2.24
  Bottom Layer w10: v1(1980,2070) 1937.56,2070 1917.56,2050 1865,2050 1835,2080 1835,2175 1955,2295 1955,2350 1984.32,2379.32 v1(1984.32,2445.77)
NetTP2_1: TP2.1 U1.15 U2.23 | length 2831.9
  Top Layer w10: v1(1925,2440) 1925,2495 2065,2635 2405,2635 2500,2540 2615,2540 2685,2470 2685,2400 TP2.1 2761.34,2326.34 2831.34,2326.34 3015,2510 3015,2770 2870,2915 2684.46,2915 2684.3,2915.16 U2.23 ; v1(1975,2030) 1979.68,2030 2001.38,2051.7 2055.24,2051.7 U1.15
  Bottom Layer w10: v1(1925,2440) 1925,2305 1810,2190 1810,2070 1850,2030 v1(1975,2030)
NetU1_5: U1.5 U7.2 | length 271.9
  Top Layer w10: U7.2 1909.41,2310.59 1971.1,2248.9 U1.5
NetU1_16: U1.16 U2.19 | length 1648.7
  Top Layer w10: U1.16 2102.36,2032.36 2170,2100 2170,2135 2225,2190 2405.82,2190 v1(2423.65,2172.17) ; U2.19 2802.2,2812.8 2865,2750 2865,2631.49 v1(2821.11,2587.6)
  Bottom Layer w10: v1(2423.65,2172.17) 2617.17,2172.17 2630,2185 2630,2505 2712.6,2587.6 v1(2821.11,2587.6)
NetU1_17: U1.17 U2.20 | length 1732.7
  Top Layer w10: U1.17 2132.36,2022.36 2190,2080 2190,2115 2240,2165 2385,2165 v1(2425,2125) ; U2.20 2811.61,2838.39 2895,2755 2895,2606.01 2875,2586.01 v1(2875,2585)
  Bottom Layer w10: v1(2425,2125) 2605,2125 2655,2175 2655,2465 2740,2550 2840,2550 v1(2875,2585)
NetU1_20: U1.20 U2.21 | length 1776.6
  Top Layer w10: U1.20 2191.42,2041.42 2220,2070 2220,2100 2255,2135 2350,2135 v1(2385,2100) ; U2.21 2826.02,2863.98 2930,2760 v1(2930,2585)
  Bottom Layer w10: v1(2385,2100) 2388.44,2096.56 2413.44,2096.56 2425,2085 2605,2085 2680,2160 2680,2435 2765,2520 2865,2520 v1(2930,2585)
NetU1_21: U1.21 U2.8 | length 1249.9
  Top Layer w10: U1.21 2211.1,2019.67 2230,2038.57 v1(2230,2041.78) ; v1(2235,2715) 2235,2770 2250,2785 2336.54,2785 2359.92,2761.61 U2.8
  Bottom Layer w10: v1(2230,2041.78) 2271.78,2041.78 2305,2075 2305,2315 2240,2380 2155,2380 2110,2425 2110,2585 2226.99,2701.99 2226.99,2702.12 2235,2710.13 v1(2235,2715)
NetU1_22: U1.22 U2.7 | length 1253.7
  Top Layer w10: v1(2175,2715) 2175,2760 2220,2805 2339.64,2805 2357.44,2787.2 U2.7 ; U1.22 2230.79,2003 2270,2042.22 v1(2270,2095)
  Bottom Layer w10: v1(2175,2715) 2175,2710.13 2166.99,2702.12 2166.99,2701.99 2070,2605 2070,2410 2135,2345 2215,2345 2270,2290 v1(2270,2095)
NetU1_23: U1.23 U2.22 | length 1728.1
  Top Layer w10: U1.23 2250.82,1955.94 2250.82,1985.82 2295,2030 2350,2030 v1(2380,2060) ; U2.22 2845.43,2889.57 2970,2765 v1(2970,2620)
  Bottom Layer w10: v1(2380,2060) 2625,2060 2705,2140 2705,2405 2765,2465 2875,2465 2970,2560 v1(2970,2620)
NRST: C18.1 CON7.10 U1.7 | length 3660.4
  Top Layer w10: C18.1 2045,2410 ; U1.7 2119.53,2209.53 2135,2225 2135,2320 2045,2410 ; CON7.10 3595,1715 3610,1700 3840,1700 3965,1825 3965,2125 3845,2245 2690,2245 2610,2325 2610,2455 2585,2480 2485,2480 2380,2585 2120,2585 2045,2510 2045,2410
SWCLK: CON7.4 U1.49 | length 2175.3
  Top Layer w10: U1.49 2427.64,2357.64 2400,2330 2400,2265 2424.07,2240.93 2444,2240.93 v1(2444.54,2240.39) ; v1(2560,2240) 2600,2240 2635,2205 3820,2205 3910,2115 3910,1915 3835,1840 3760,1840 3749.52,1829.52 3749.52,1779.52 CON7.4
  Bottom Layer w10: v1(2444.54,2240.39) 2444.93,2240 v1(2560,2240)
SWDIO: CON7.2 U1.46 | length 1916.2
  Top Layer w10: U1.46 2601.73,2288.27 2665,2225 3830,2225 3940,2115 3940,1905 3819.1,1784.1 3804.1,1784.1 CON7.2
SWO: CON7.6 U1.55 | length 2220
  Top Layer w10: U1.55 2309.53,2301.48 v1(2386.01,2225) ; v1(2590,2205) 2615,2180 3810,2180 3880,2110 3880,1930 3810,1860 3715,1860 3695,1840 CON7.6
  Bottom Layer w10: v1(2386.01,2225) 2387.02,2225 2407.02,2205 v1(2590,2205)
VIN: C10.1 C13.1 D1.1 D2.1 U5.3 U6.3 | length 3150
  Top Layer w30: 1085,1939.45 1085,2240 1104.57,2259.57 C13.1 1104.57,2399.57 1135,2430 1135,2509.29 U6.3 U6.3@1110.24,2509.45 ; U5.3 1074.45,1939.45 1045,1910 1045,1775 1065,1755 1103.19,1755 C10.1 1104.57,1680.43 1135,1650 1530,1650 1555,1675 1555,1745 1579.29,1769.29 1609.76,1769.29 1610,1769.53 D1.1 1777.99,1772.01 1825,1725 1975,1725 2000,1750 2430,1750 2550,1630 2890,1630 2920,1660 2920,1709.8 2945.2,1735 2965.41,1735 2965.68,1734.72 2979.76,1734.72 2980,1734.49 D2.1
pads on no net: CON7.7 CON7.8 U1.2 U1.3 U1.4 U1.6 U1.8 U1.9 U1.10 U1.11 U1.24 U1.25 U1.26 U1.27 U1.28 U1.29 U1.35 U1.36 U1.41 U1.42 U1.43 U1.44 U1.45 U1.50 U1.51 U1.52 U1.53 U1.54 U1.56 U1.57 U1.58 U1.59 U2.4 U3.5 U3.8 U4.5 U4.8

## Polygon pours and split planes (outlines as drawn)
GND on Bottom Layer "NONET_L-01_P-001" (solid, pour order 0): 1000,3500 1000,1000 4000,1000 4000,3500

## Silkscreen, mask and mechanical layers (free items; w line width, h text height)
Top Overlay:
  lines w10: 1465,1380 1465,1480 1465,1525 1510,1525 ; 1500,2910 1500,2755 1645,2755 ; 1661.78,1380 1661.78,1480 ; 1750,1525 2252.13,1525 2252.13,1480 2252.13,1380 ; 1858.56,1380 1858.56,1480 ; 2055.34,1380 2055.34,1480 ; 2135,2755 2223.15,2755 2223.15,2910 ; 2751.85,1380 2751.85,1480 2751.85,1525 2796.85,1525 ; 2795,2910 2795,2755 2940,2755 ; 2948.63,1380 2948.63,1480 ; 3036.85,1525 3538.98,1525 3538.98,1480 3538.98,1380 ; 3145.41,1380 3145.41,1480 ; 3342.19,1380 3342.19,1480 ; 3430,2755 3518.15,2755 3518.15,2910
  text "+ Side" at 1515,2853.2 h55
  text "- Side" at 1925,2853.2 h55
  text "+ Side" at 2810,2853.2 h55
  text "- Side" at 3220,2853.2 h55
  text "Strain Gauge" at 1660,2750.48 h50
  text "Strain Gauge" at 2955,2750.48 h50
  text "Interface 2" at 2960,2680.01 h50
  text "Interface 1" at 1665,2675.48 h50
  text "REV20210513A" at 3500,2595 h40
  text "Dual Torque Sensor" at 2840,2446.68 h80
  text "Strain-Gauge-Based" at 3410,2392.84 h35
  text "DesktopDyno.org" at 3225,2260 h100
  text "Debug" at 3750,1643.34 h40
  text "CAN1" at 1531.69,1495.01 h50
  text "CAN2" at 2813.36,1495.01 h50
  text "Termination" at 2290,1464.51 h40
  text "12V" at 1463.65,1410 h35
  text "CANH" at 1659.77,1410 h35
  text "CANL" at 1860.03,1410 h35
  text "GND" at 2057.85,1410 h35
  text "12V" at 2750.5,1410 h35
  text "CANH" at 2946.62,1410 h35
  text "CANL" at 3146.88,1410 h35
  text "GND" at 3344.7,1410 h35
  text "CAN1" at 2354.99,1105 h40 r90
  text "CAN2" at 2699.99,1105 h40 r90
Mechanical 1:
  the board outline again, w1